# EAGLE board Button pannel (EAGLE 9.6.2)
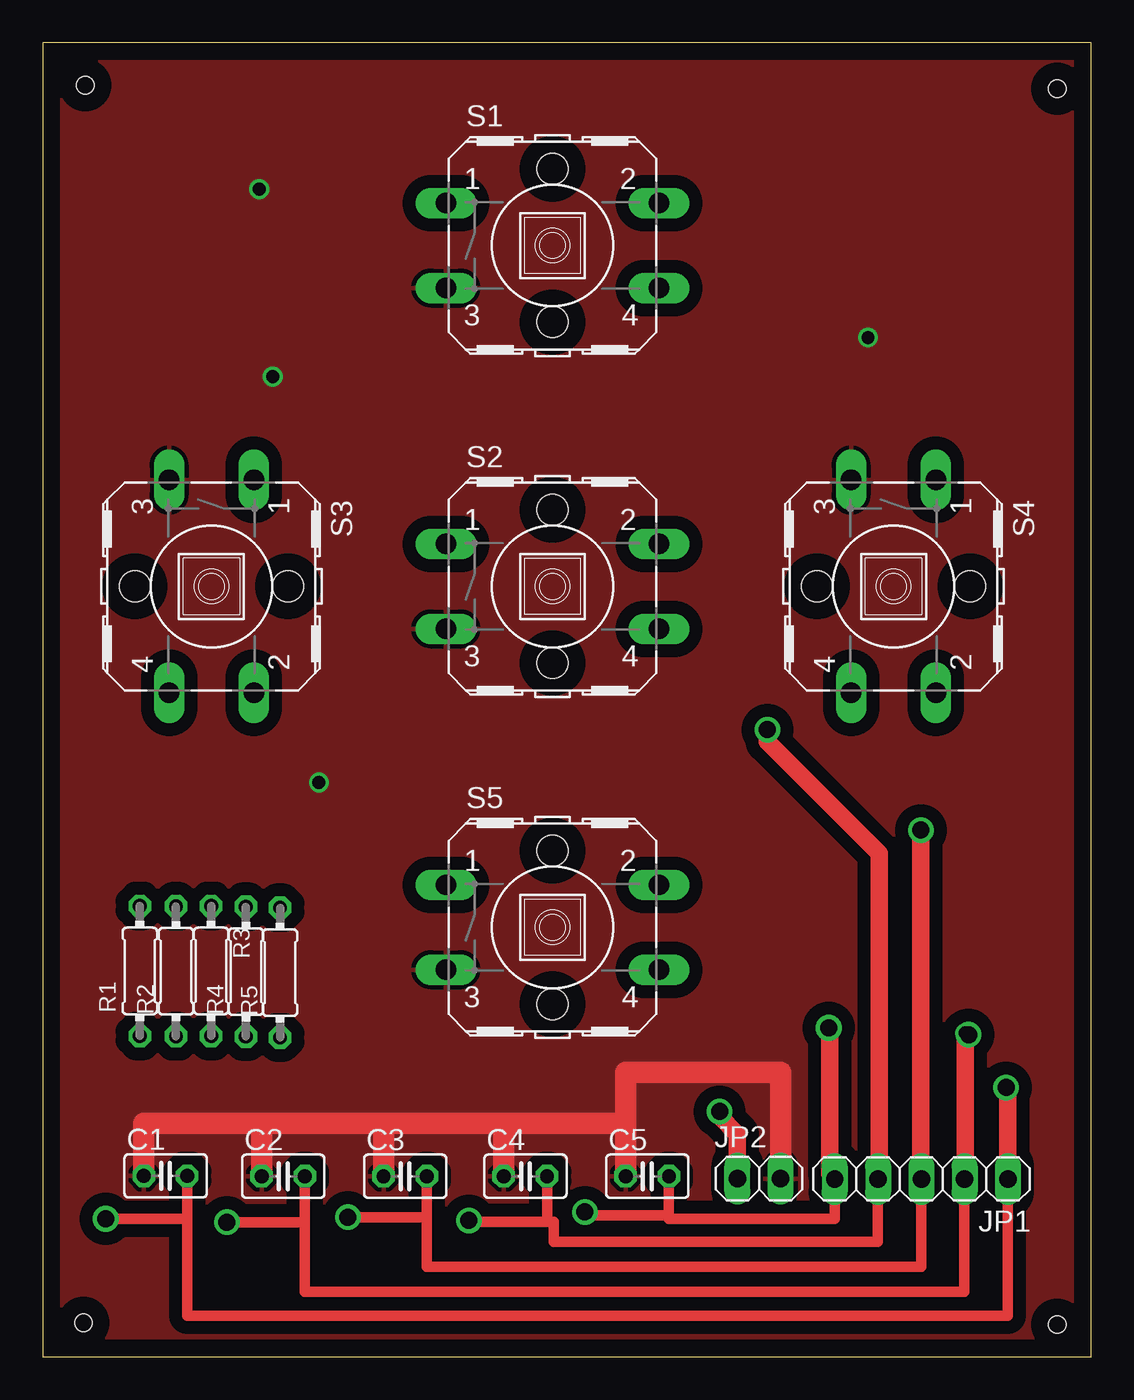
[diagram p0: board, top side]
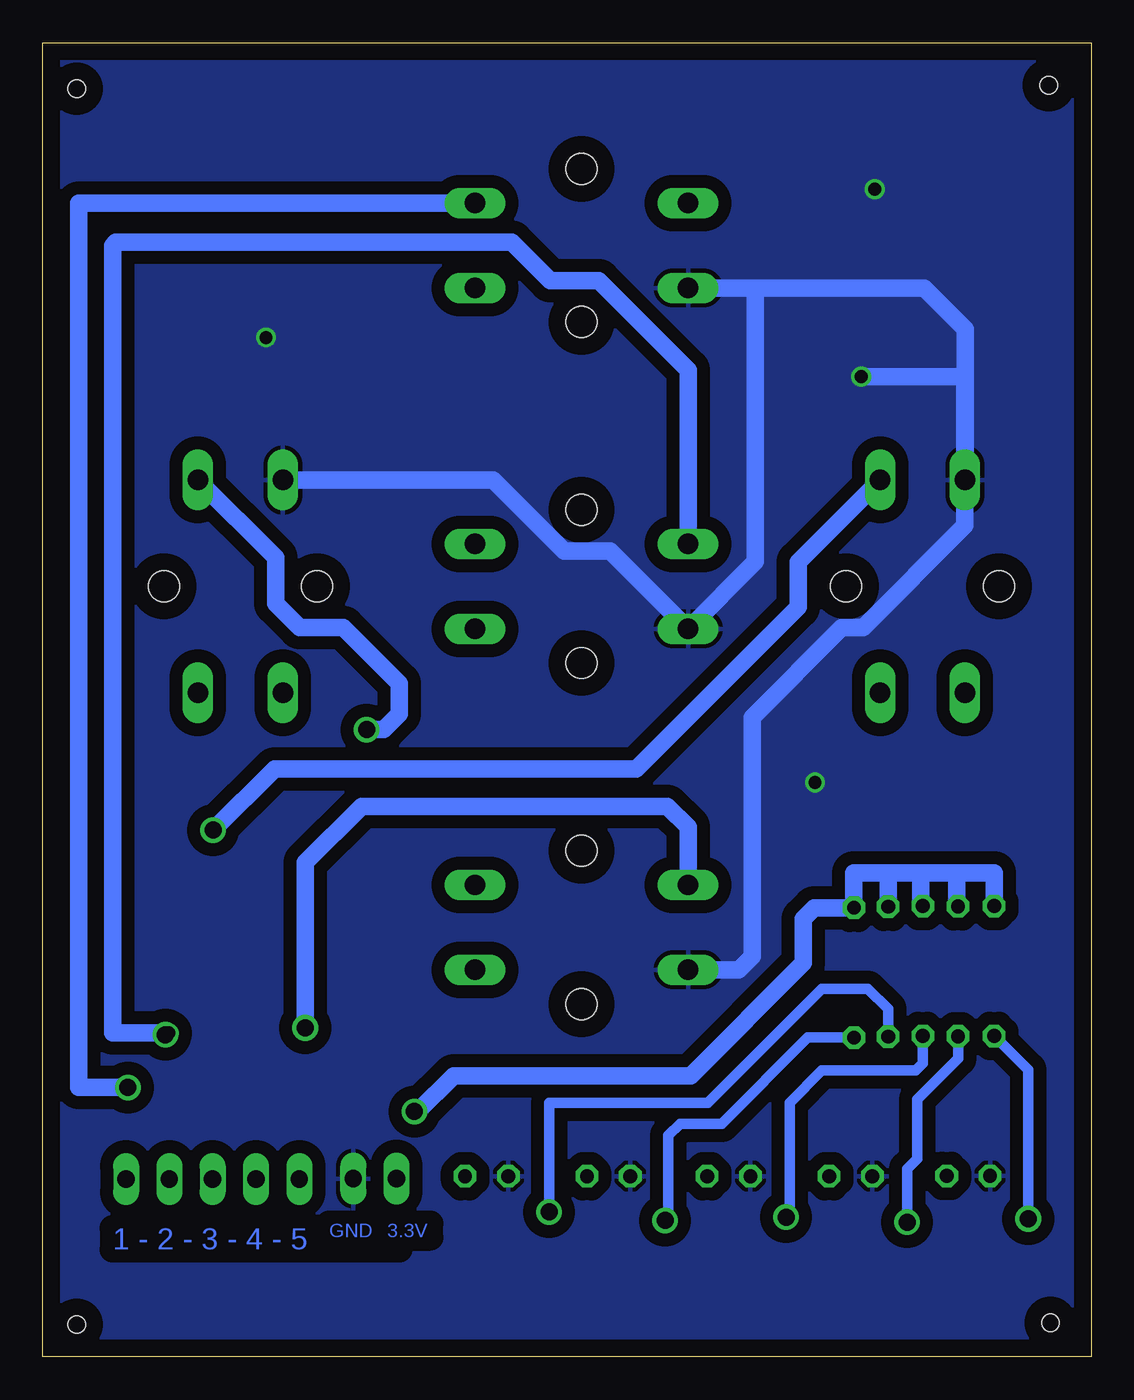
[diagram p1: board, bottom side, seen from below]

Size 61.5 x 77.1 mm. Coordinates in mm from the lower left corner, seen from the top.
Outline: 0,0 61.5,0 61.5,77.1 0,77.1 0,0
Copper layers (1*16): Top 0.035mm / dielectric 1.5mm / Bottom 0.035mm
Design rules "default *": minimum track width 6mil, minimum drill 0.35mm, track to track 30mil, track to pad 30mil, pad to pad 30mil, via to via 30mil, smd to smd 6mil, copper to edge 40mil, drill to drill 6mil, minimum pad ring 10mil, minimum via ring 8mil, stop-mask expansion 4mil, vias tented up to drill 0mil, thermal gap 10mil
Holes 1 mm at 2.5,74.6 59.5,74.4 59.5,1.9 2.4,2

## Footprints (pad centres in the part's own frame; a part is rotated, then mirrored left to right if it is on the bottom)
C025-025X050 = drill 0.813 octagon: 1 -1.27,0; 2 1.27,0
1X05 = drill 1.016 long: 1 -5.08,0; 2 -2.54,0; 3 0,0; 4 2.54,0; 5 5.08,0
1X02 = drill 1.016 long: 1 -1.27,0; 2 1.27,0
0204/7 = drill 0.813 octagon: 1 -3.81,0; 2 3.81,0
B3F-40XX = drill 1.194 long: 1 -6.248,2.489; 2 6.248,2.489; 3 -6.248,-2.489; 4 6.248,-2.489 | hole 1.803: 0,-4.496; 0,4.496

## Placement (x,y rotation side)
C1  [C025-025X050]  7.21,10.62 0 top
C2  [C025-025X050]  14.11,10.6 0 top
C3  [C025-025X050]  21.26,10.6 0 top
C4  [C025-025X050]  28.31,10.6 0 top
C5  [C025-025X050]  35.46,10.6 0 top
JP1  [1X05]  51.53,10.44 180 top
JP2  [1X02]  42.01,10.46 0 top
R1  [0204/7]  5.7,22.64 90 top
R2  [0204/7]  7.82,22.62 90 top
R3  [0204/7]  9.88,22.64 270 top
R4  [0204/7]  11.92,22.6 90 top
R5  [0204/7]  13.92,22.54 90 top
S1  [B3F-40XX]  29.9,65.2 0 top
S2  [B3F-40XX]  29.9,45.2 0 top
S3  [B3F-40XX]  9.9,45.2 270 top
S4  [B3F-40XX]  49.9,45.2 270 top
S5  [B3F-40XX]  29.9,25.2 0 top

## Library data of the parts
C1-C5 = rcl; SPICEPREFIX: C
JP1 JP2 = pinhead
R1-R5 = rcl; SPICEPREFIX: R
S1-S5 = switch-omron

## Nets
GND: C1.1 C2.1 C3.1 C4.1 C5.1 JP2.2 S1.3 S2.3 S3.3 S4.3 S5.3
N$1: C2.2 JP1.2 R2.1 S2.1
N$2: C1.2 JP1.1 R1.1 S1.2
N$3: C3.2 JP1.3 R3.2 S3.1
N$4: C4.2 JP1.4 R5.1 S4.1
N$5: C5.2 JP1.5 R4.1 S5.1
N$6: JP2.1 R1.2 R2.2 R3.1 R4.2 R5.2

## Tracks (layer width: path | path; a pad name or v marks a point on that pad's centre or on a via)
GND  (via drill 0.75)
  Top 1.27: JP2.2 43.28,16.7 34.19,16.7 34.19,13.7 | 34.19,13.7 C5.1 | 34.19,13.7 27.04,13.7 | 27.04,13.7 C4.1 | 27.04,13.7 19.99,13.7 | 19.99,13.7 C3.1 | 19.99,13.7 12.84,13.7 | 12.84,13.7 C2.1 | 12.84,13.7 5.94,13.7 C1.1
  Bottom 1.016: S1.3 19.7,62.71 | 19.7,62.71 9.81,62.71 7.4,60.3 S3.3 | 19.7,62.71 19.7,46.66 S2.3 28.21,47.27 30.91,47.27 35.08,51.45 S4.3 | S3.3 7.41,48.76 13.39,42.77 14.63,42.77 19.9,37.5 19.9,23.5 20.69,22.71 S5.3 | S3.3 7.41,57.5 v13.5,57.5
  other vias: 12.7,68.5 48.4,59.8 16.2,33.7
  pour Top: 0,77.1 61.6,76.9 61.6,-0.2 0,0
  pour Bottom: 0,77.1 61.5,77.1 61.5,0 0,0
N$1  (via drill 0.75, 1)
  Top 0.61: JP1.2 54.05,10.44 54.05,3.81 15.38,3.81 15.38,7.9 | 15.38,7.9 C2.2 | 15.38,7.9 v10.8,7.9
  Top 1.016: v54.1,19 54.1,10.49 54.05,10.44
  Bottom 0.61: R2.1 7.82,17.51 10.22,15.11 10.22,11.61 10.8,11.03 v10.8,7.9
  Bottom 1.016: S2.1 23.65,57.89 28.89,63.13 31.73,63.13 34,65.4 57.2,65.4 57.4,65.2 57.4,19 v54.1,19
N$2  (via drill 0.35, 0.75, 1)
  Top 0.61: C1.2 8.48,8.1 | 8.48,8.1 8.48,2.4 56.61,2.4 56.61,10.2 JP1.1 | 8.48,8.1 v3.7,8.1
  Top 1.016: v56.6,15.8 56.6,10.2 56.61,10.2
  Bottom 0.61: v3.7,8.1 3.7,16.83 R1.1
  Bottom 1.016: S1.2 59.38,67.69 59.38,15.8 v56.6,15.8
N$3  (via drill 1)
  Top 0.61: JP1.3 51.51,10.44 51.51,5.28 22.53,5.28 22.53,8.2 | 22.53,8.2 C3.2 | 22.53,8.2 v17.9,8.2
  Top 1.016: v51.5,30.9 51.5,10.47 JP1.3
  Bottom 0.61: v17.9,8.2 17.7,8.4 17.7,14.9 15.8,16.8 10.3,16.8 9.88,17.22 R3.2
  Bottom 1.016: S3.1 17.2,46.64 17.2,44 26.7,34.5 47.9,34.5 v51.5,30.9
N$4  (via drill 1)
  Top 0.61: JP1.4 48.97,10.44 48.97,6.74 29.98,6.74 29.98,7.94 29.58,7.94 | C4.2 29.58,7.94 | 29.58,7.94 25.06,7.94 v25,8
  Top 1.016: v42.5,36.8 42.5,36.1 49.07,29.53 49.07,10.52 JP1.4
  Bottom 0.61: R5.1 16.62,18.73 21.67,13.68 24.12,13.68 24.8,13 24.8,8.2 v25,8
  Bottom 1.016: S4.1 47.83,46.89 47.83,44.2 46.41,42.77 43.87,42.77 40.6,39.5 40.6,37.7 41.5,36.8 v42.5,36.8
N$5  (via drill 1)
  Top 0.61: JP1.5 46.45,8.1 36.73,8.1 36.73,8.3 | C5.2 36.73,8.3 | v31.8,8.5 31.8,8.3 36.73,8.3
  Top 1.016: JP1.5 46.15,10.74 46.15,19.25 v46.1,19.3
  Bottom 0.61: v31.8,8.5 31.8,14.9 22.5,14.9 15.8,21.6 13.1,21.6 11.92,20.42 R4.1
  Bottom 1.016: S5.1 23.65,31.09 24.86,32.3 42.8,32.3 46.1,29 v46.1,19.3 46.2,19.3
N$6  (via drill 1)
  Top 1.016: JP2.1 40.74,13.06 39.7,14.1 v39.7,14.4
  Bottom 1.016: v39.7,14.4 39.5,14.4 37.4,16.5 23.5,16.5 16.9,23.1 16.9,25.7 16.25,26.35 R5.2 13.92,28.4 11.92,28.4 | R1.2 5.7,28.4 7.9,28.4 | 7.9,28.4 7.9,26.43 R2.2 | 7.9,28.4 10,28.4 | 10,28.4 11.92,28.4 | 11.92,28.4 R4.2 | 10,28.4 10,26.45 R3.1
N$7  (via drill 1)
  other vias: 54.3,18.9
N$9  (via drill 1)
  other vias: 56.5,15.8

## Text on the board
Bottom: 3.3V | GND | 1 - 2 - 3 - 4 - 5